# Altium PCB PCB_fonte_beta.PcbDoc
Units mil, origin at the board's own origin, x right, y up, seen from the top; angles counter-clockwise.
Board outline 3905 x 1430 mil, 2 copper layers (Top Layer, Bottom Layer); 21 components, 15 nets, 53 pads, 0 vias.
Unrouted connection lines stored in the file: 1.
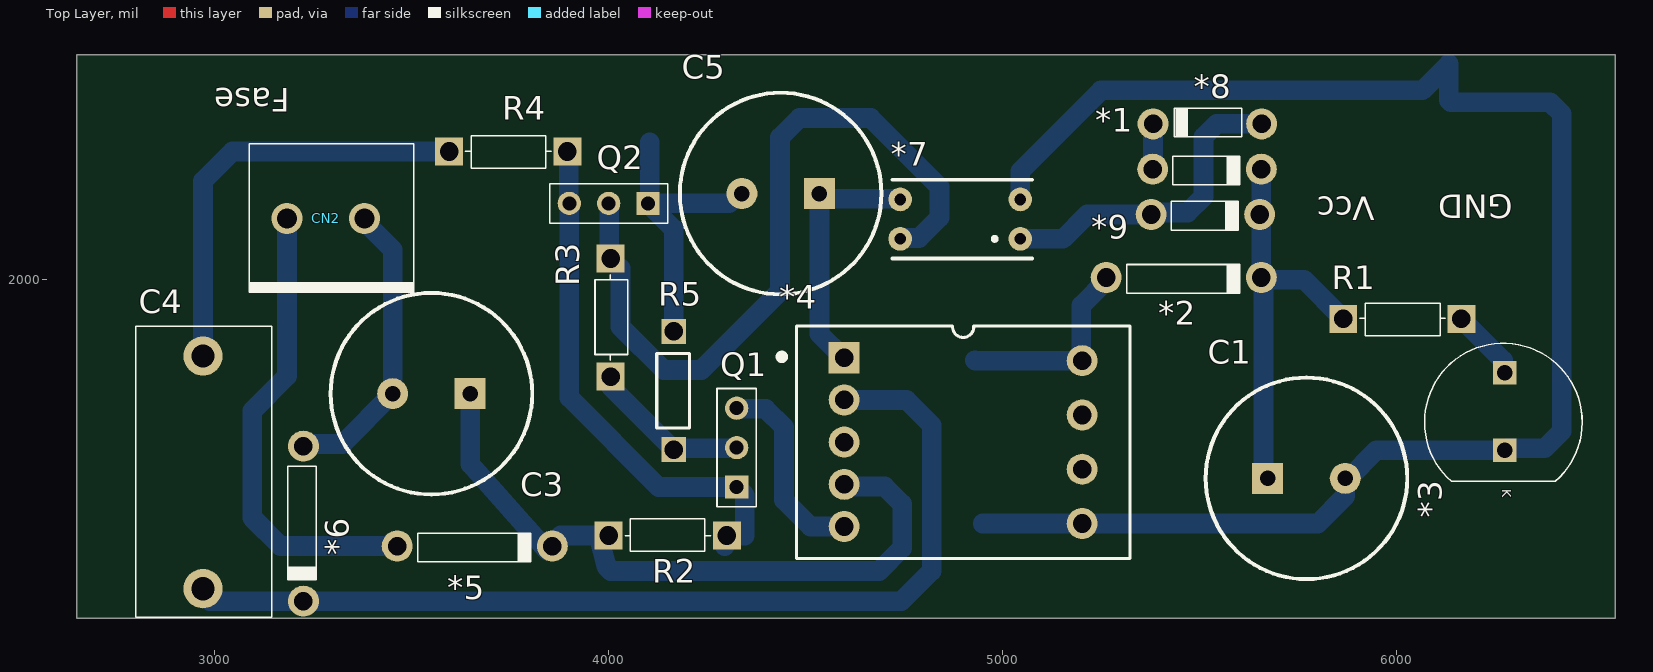
[diagram p0: Top Layer view]
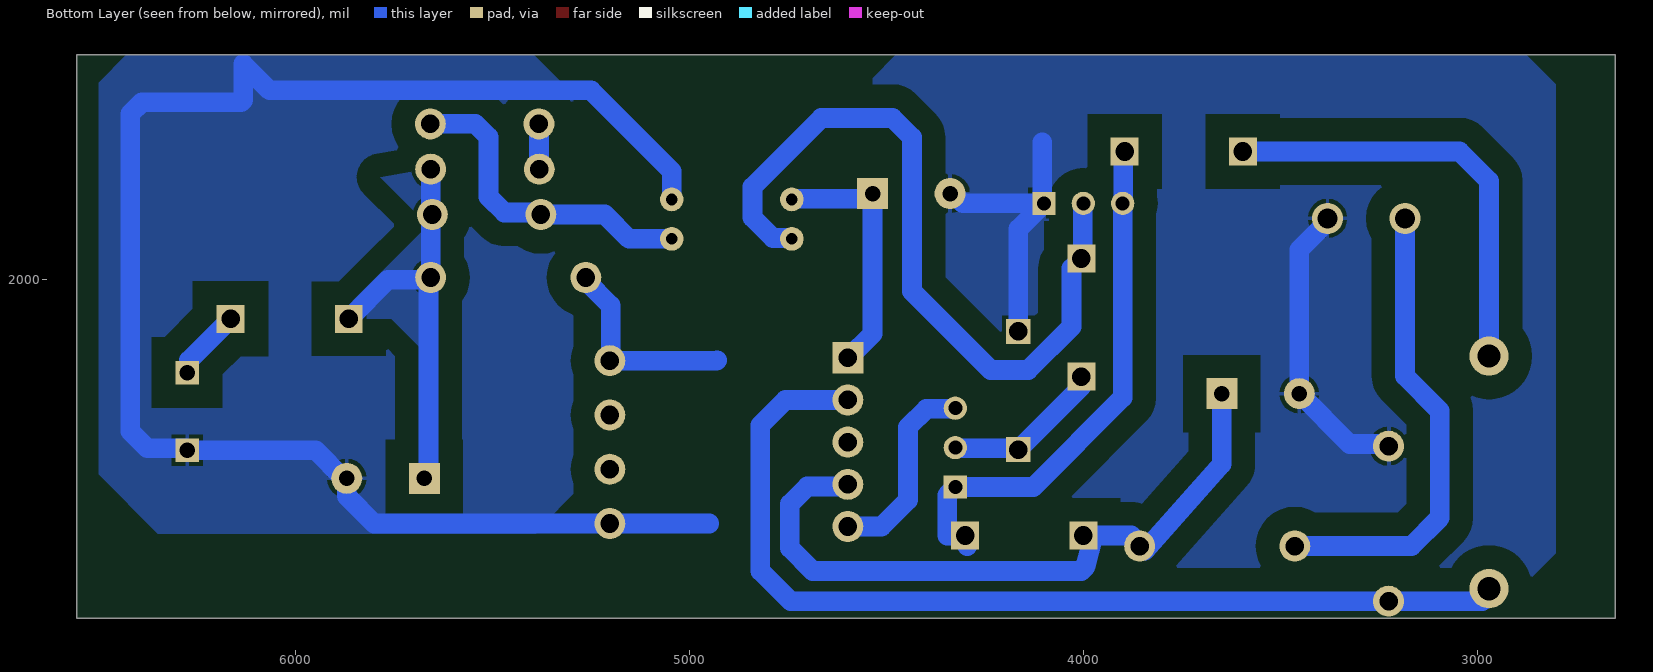
[diagram p1: Bottom Layer view, seen from below]
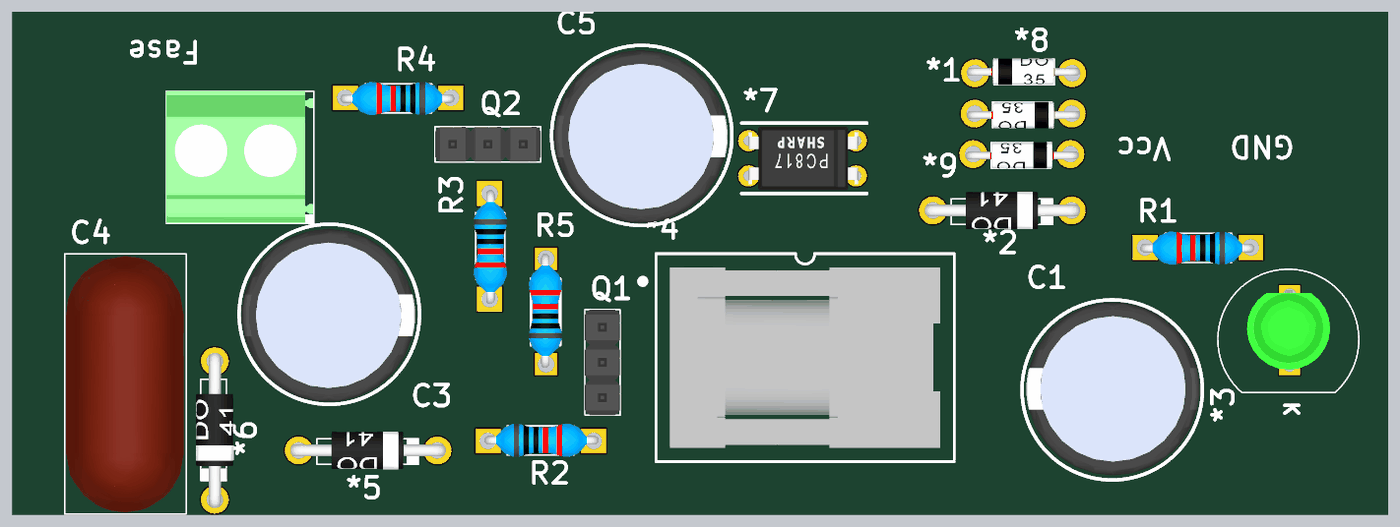
[diagram p2: 3D render of the assembled board from above, using the file's embedded part models]

## Layer stack, top to bottom
Top Solder: solder mask 0.4, Solder Resist, Dk 3.5
Top Layer: signal copper 1.4
Dielectric 1: dielectric 12.6, FR-4, Dk 4.8
Bottom Layer: signal copper 1.4
Bottom Solder: solder mask 0.4, Solder Resist, Dk 3.5

## Board outline
2650,1140 6555,1140 6555,2570 2650,2570

## Design rules (kind name [scope] priority, off if disabled: settings)
Clearance [All] p1: gap=10 ignorepadtopadclearanceinfootprint=FALSE except(0: Arc-Hole Track-Hole SMDPad-Hole THPad-Hole Via-Hole Fill-Hole Poly-Hole Region-Hole Text-Hole; 60: Arc-Fill Arc-Poly Arc-Region Track-Fill Track-Poly Track-Region SMDPad-Fill SMDPad-Poly SMDPad-Region THPad-Fill THPad-Poly THPad-Region Via-Fill Via-Poly Via-Region Fill-Fill Fill-Poly Fill-Region Poly-Poly Poly-Region Region-Region)
PolygonConnect [All] p1: connectstyle=Relief reliefconductorwidth=10 reliefentries=4 polygonreliefangle="90 Angle" airgapwidth=10
RoutingVias [All] p1: holewidth=28 width=50 viastyle="Through Hole" minholewidth=28 minwidth=50 maxholewidth=28 maxwidth=50
SolderMaskExpansion [All] p1: expansion=4
Width [All] p1: maxlimit=55 minlimit=45 preferedwidth=50 minimp=50.000000 maximp=50.000000 favimp=50.000000
30 further rules are at their usual default settings.

## Components (designator, comment, footprint, x,y, rotation, side; value= is the part's Value field where it differs from the comment)
*1 "DIO_ZENER_DO35" DIO_PTH_DO35 5519.06,2280 r180 top value=12V
*2 "DIO_PTH_1N4007" DIO_PTH_DO41 5460,2005 r180 top value=?
*3 "LED_AXIAL_5MM" LED_Axial_5mm 6275,1665 r270 top value=?
*4 "Tranformer PLC" "DIV_TRAFO PLC" 4900,1587.05 r0 top
*5 "DIO_SMD_1N4148" DIO_PTH_DO41 3660,1323.15 r180 top value=?
*6 "DIO_PTH_1N4007" DIO_PTH_DO41 3225,1380 r90 top value=?
*7 "CI_Optocoupler" SFH6106 5045,2103.15 r180 top
*8 "DIO_ZENER_DO35" DIO_PTH_DO35 5520,2395 r0 top value=12V
*9 "DIO_ZENER_DO35" DIO_PTH_DO35 5515,2165 r180 top value=12V
C1 "Electrolytic Capacitor" CAP_ALU_RADIAL_5MM 5771.57,1495 r0 top value=100uF
C3 "Electrolytic Capacitor" CAP_ALU_RADIAL_5MM 3550,1710 r180 top value=22uF
C4 "CAP_POL_RADIAL_16MM" CAP_POL_RADIAL_16MM 2970,1805.55 r270 top value=4.7nF
C5 "10uF" CAP_ALU_RADIAL_5MM 4436.57,2218.15 r180 top value=?F
CN2 "?" CN_KRE_2 3281.57,2155 r0 top
Q1 "NPN_BC817" HEADER_1X3 4275,1573.15 r90 top
Q2 "NPN_BC817" HEADER_1X3 4000,2143.15 r180 top
R1 "330" RES_PTH_7.62MM 6015,1900 r180 top
R2 "1.6M" RES_PTH_7.62MM 4150,1350 r0 top
R3 "1k" RES_PTH_7.62MM 4005,1903.15 r270 top
R4 "?" RES_PTH_7.62MM 3745,2325 r180 top
R5 "*" RES-7.62mm 4165,1718.15 r90 top

## Footprints (in the part's own frame and the unit in brackets; to place one, negate y for a bottom-side part, rotate by r counter-clockwise, add the part's x,y. Pads: shape width x height; smd on the part's side, far side on the other; paste and mask are expansions set on the pad)
CAP_ALU_RADIAL_5MM [mm]
  rect 2x2 hole 1: 1(-2.5,0)
  round 2 hole 1: 2(2.5,0)
  silkscreen extent -6.5,-6.5 6.5,6.5, body extent -6.19,-6.18 6.29,6.32, height 20
CAP_POL_RADIAL_16MM [mm] "16 mm Pitch"
  round 2.54 hole 1.5: 1(0,0) 2(15,0)
  silkscreen extent -1.93,-4.34 16.84,4.42, body extent -1.78,-4.25 16.72,4.25, height 16.5
CN_KRE_2 [mm]
  round 2 hole 1.3: 1(-2.5,0) 2(2.5,0)
  silkscreen extent -4.93,-4.75 5.69,4.8, body extent -4.93,-4.7 5.64,4.8, height 15
DIO_PTH_DO35 [mm]
  round 2 hole 1.2: A(3.5,0) K(-3.5,0)
  silkscreen extent -2.12,-0.86 2.21,1.07, body extent -4.11,-0.86 4.07,1.06, height 1.96
DIO_PTH_DO41 [mm]
  round 2 hole 1.2: A(5,0) K(-5,0)
  silkscreen extent -3.62,-0.86 3.69,1.02, body extent -5.65,-1.36 5.71,1.36, height 1.36
"DIV_TRAFO PLC" [mm] "PLC TRANSFORMER EE13 THT TI"
  rect 2x2 hole 1.2: 1(-7.675,5.44)
  round 2 hole 1.2: 2(-7.675,2.72) 3(-7.675,0) 4(-7.675,-2.72) 5(-7.675,-5.44) 6(7.675,-5.25) 7(7.675,-1.75) 8(7.675,1.75) 9(7.675,5.25)
  silkscreen extent -11.9,-7.5 10.75,7.5, body extent -9.75,-6.5 9.75,6.5, height 10.35
HEADER_1X3 [mm] "Connector; Header; 3x2 Position"
  rect 1.5x1.5 hole 0.9: 1(-2.54,-1.27)
  round 1.5 hole 0.9: 2(0,-1.27) 3(2.54,-1.27)
  silkscreen extent -3.81,-2.54 3.81,0, body extent -3.81,-2.54 3.81,0, height 9.5
LED_Axial_5mm [mm]
  rect 1.5x1.5 hole 1: A(-2.5,0) K(2.5,0)
  silkscreen extent -4.39,-5.17 4.51,4.99, body extent -2.84,-3.07 2.86,2.92, height 21.86
RES-7.62mm [mm]
  rect 1.6x1.6 hole 1.2: 1(-3.81,0) 2(3.81,0)
  silkscreen extent -2.43,-1.01 2.38,1.09, body extent -4.06,-1.15 4.16,1.25, height 3.2
RES_PTH_7.62MM [mm]
  rect 1.8x1.8 hole 1.2: 1(-3.81,0) 2(3.81,0)
  silkscreen extent -2.76,-1.01 2.76,1.09, body extent -4.06,-1.15 4.16,1.25, height 3.2
SFH6106 [mil] "TNY optocoupler"
  round 60 hole 30: 1(0,0) 2(0,-100) 3(304.96,-100) 4(304.96,0)
  silkscreen extent -30,-150 325,50, body extent -5,-140 305,40, height 169

## Part data
*4: Supplier Part Number 1=1297-1074-ND, Supplier 1=Digi-Key
C1 C3 C5: library part CAP_ALU_RADIAL_5MM, "PTH Radial Electrolytic Capacitor"
  C1 C5: Tensгo=?
  C3: Tensгo=400V
C4: "PTH Radial Polyester Capacitor", Tensгo=?
CN2: library part CN_MKDS_2, "MKDS_2"
R1 R2 R3 R4: library part RES_PTH_7.62MM, "Pin Through Hole Resistor 7.62mm"
R5: library part RES_PTH300, "Pin Through Hole Resistor 300mils/7.62mm"

## Nets (pads, with @x,y where several pads share a name; then routed paths per layer and width w, separated by ;. In a path a pad name is that pad's centre, name@x,y a point inside that pad or via, vN(x,y) a via of type N, cw(c..) or ccw(c..) an arc to the next point about the centre after c; other vN are vias at no path point)
dio: *4.2 *6.K C4.2 | length 2522.5
  Bottom Layer w50: C4.2 2979.57,1205.43 2979.57,1190.43 2986.85,1183.15 *6.K 4743.15,1183.15 4820,1260 4820,1630 4755.87,1694.13 *4.2
GND: *3.K *4.6 *6.A *7.2 C1.2 C3.2 C5.2 CN2.2 Q2.1 R5.2 | length 5578.3
  Bottom Layer w50: *6.A 3230.5,1582.35 3323.92,1582.35 C3.2 3451.57,2075.65 3380,2147.22 CN2.2 ; 4104.53,2348.44 4104.53,2197.68 Q2.1 ; R5.2 4165,2128.15 Q2.1 ; C5.2 4330.37,2218.15 4305.37,2193.15 Q2.1 ; 4950,1380.35 *4.6 5800.35,1380.35 5870,1450 C1.2 5877.78,1495 5949.35,1566.57 *3.K 6279.53,1571.1 6376.1,1571.1 6420,1615 6420,2420 6390,2450 6138.43,2450 6132.93,2455.5 6132.93,2547.07 6065.85,2480 5250,2480 5045,2275 *7.2
I8: *4.1 *7.3 C5.1 | length 653.3
  Bottom Layer w50: *4.1@4595.67,1801.22 4535,1861.89 C5.1 4548.09,2205.06 4738.13,2205.06 *7.3
Net*1_A: *1.A *8.K | length 115.4
  Bottom Layer w50: *1.A 5381.73,2280.47 5381.73,2394.53 *8.K
Net*1_K: *1.K *2.K *9.K C1.1 R1.2 | length 1035.6
  Bottom Layer w50: *1.K 5656.85,2165 *2.K *2.K@5662.35,1999.5 ; C1.1 5662.35,1505.8 *2.K@5662.35,1999.5 ; R1.2 5765.5,1999.5 *2.K@5662.35,1999.5
Net*2_A: *2.A *4.9 | length 510.1
  Bottom Layer w50: 4930,1795 4931.26,1793.74 *4.9@5200,1793.74 ; *4.9 *4.9@5200,1793.74 ; *2.A 5263.15,1997.22 5200,1934.07 *4.9@5200,1793.74
Net*3_A: *3.A R1.1 | length 182.1
  Bottom Layer w50: R1.1 6270.47,1794.53 6270.47,1767.95 *3.A
Net*4_2: *4.4 *5.K C3.1 R2.1 | length 1760.8
  Bottom Layer w50: C3.1 3648.43,1531.57 3843.81,1311.57 3855.31,1324.52 3877.95,1350 3974.03,1350 3975.7,1343.63 3995,1270 4005,1260 4686.85,1260 4745,1318.15 4745,1430 4700.54,1474.46 4603.33,1474.46 *4.4
Net*4_4: *4.5 Q1.3 | length 505.6
  Bottom Layer w50: Q1.3 4326.73,1671.42 4398.58,1671.42 4445,1625 4445,1440 4512.15,1372.85 *4.5
Net*5_A: *5.A CN2.1 | length 1198.9
  Bottom Layer w50: CN2.1 3183.15,1754.72 3095,1666.57 3095,1395 3166.85,1323.15 *5.A *5.A@3460,1320
Net*7_4: *7.4 Q2.2 R3.1 | length 1950.1
  Bottom Layer w50: Q2.2@4001.73,2194.88 Q2.2 4001.73,2191.42 4001.73,2056.42 R3.1 4030,2028.15 4030,1880 4140,1770 4235,1770 4435,1970 4435,2360.71 4484.29,2410 4665,2410 4840,2235 4840,2157.44 4787.62,2105.06 4741.95,2105.06 *7.4
NetC4_1: C4.1 R4.2 | length 1104.1
  Bottom Layer w50: C4.1 2970,2250 3045,2325 R4.2 R4.2@3592.5,2327.5
NetQ1_1: Q1.1 Q2.3 R2.2 R4.1 | length 1355.5
  Bottom Layer w50: R4.1 3898.27,2321.73 3898.27,2194.88 Q2.3 3900,1700 4126.85,1473.15 Q1.1 4345.83,1452.32 4345.83,1350 R2.2 4295,1350 R2.2@4295,1323.15
NetQ1_2: Q1.2 R3.2 R5.1 | length 413.3
  Bottom Layer w50: R3.2 4005,1728.15 R5.1 4168.27,1571.42 4323.27,1571.42 Q1.2
Octo: *7.1 *8.A *9.A | length 822.5
  Bottom Layer w50: *7.1 5153.15,2103.15 5215,2165 *9.A 5382.2,2170 5470,2170 5510,2210 5510,2361.57 5543.43,2395 *8.A
pads on no net: *4.3 *4.7 *4.8

## Polygon pours and split planes (outlines as drawn)
GND on Bottom Layer "GND_L02_P012" (solid, remove dead copper, pour order 12): 2870,1125.35 2870.35,1125 4335,1125 4535,1325 4535,2511.45 4476.45,2570 2875,2570 2800,2495 2800,1305 2979.65,1125.35
GND on Bottom Layer "GND_L02_P010" (solid, remove dead copper, pour order 10): 5365,1380.35 5390.35,1355 6350,1355 6500,1505 6500,2500 6430,2570 5395,2570 5295,2470 5295,1455.35 5370,1380.35
Net*1_K on Bottom Layer "NET*1_K_L02_P008" (solid, remove dead copper, pour order 8): 5785,2260 5690,2165 5652.8,2165 5652.8,2262.8 5670,2280
no net on Bottom Layer "Bottom Layer-No Net" (solid, pour order 6): 5656.85,2160
Net*1_K on Bottom Layer "NET*1_K_L02_P004" (solid, remove dead copper, pour order 4): 5662.35,1805 5757.35,1900 5900,1900 5665.47,2134.53
no net on Bottom Layer "Bottom Layer-No Net 1" (solid, pour order 2): 5670,1885

## Silkscreen, mask and mechanical layers (free items; w line width, h text height)
Top Overlay:
  text "Fase" at 3190,2485 h60 r180
  text "GND" at 6295,2215 h60 r180
  text "Vcc" at 5945,2210 h60 r180

## Text inside footprints (layer, text, board x,y; h text height)
*3: Top Overlay "K" at 6260.83,1467.36 h39.37 r270